# Altium PCB Aq1B_Guppy.PcbDoc
Units mm, origin at the board's own origin, x right, y up, seen from the top; angles counter-clockwise.
Board outline 105 x 55 mm, 2 copper layers (Top Layer, Bottom Layer); 40 components, 24 nets, 140 pads, 25 vias.
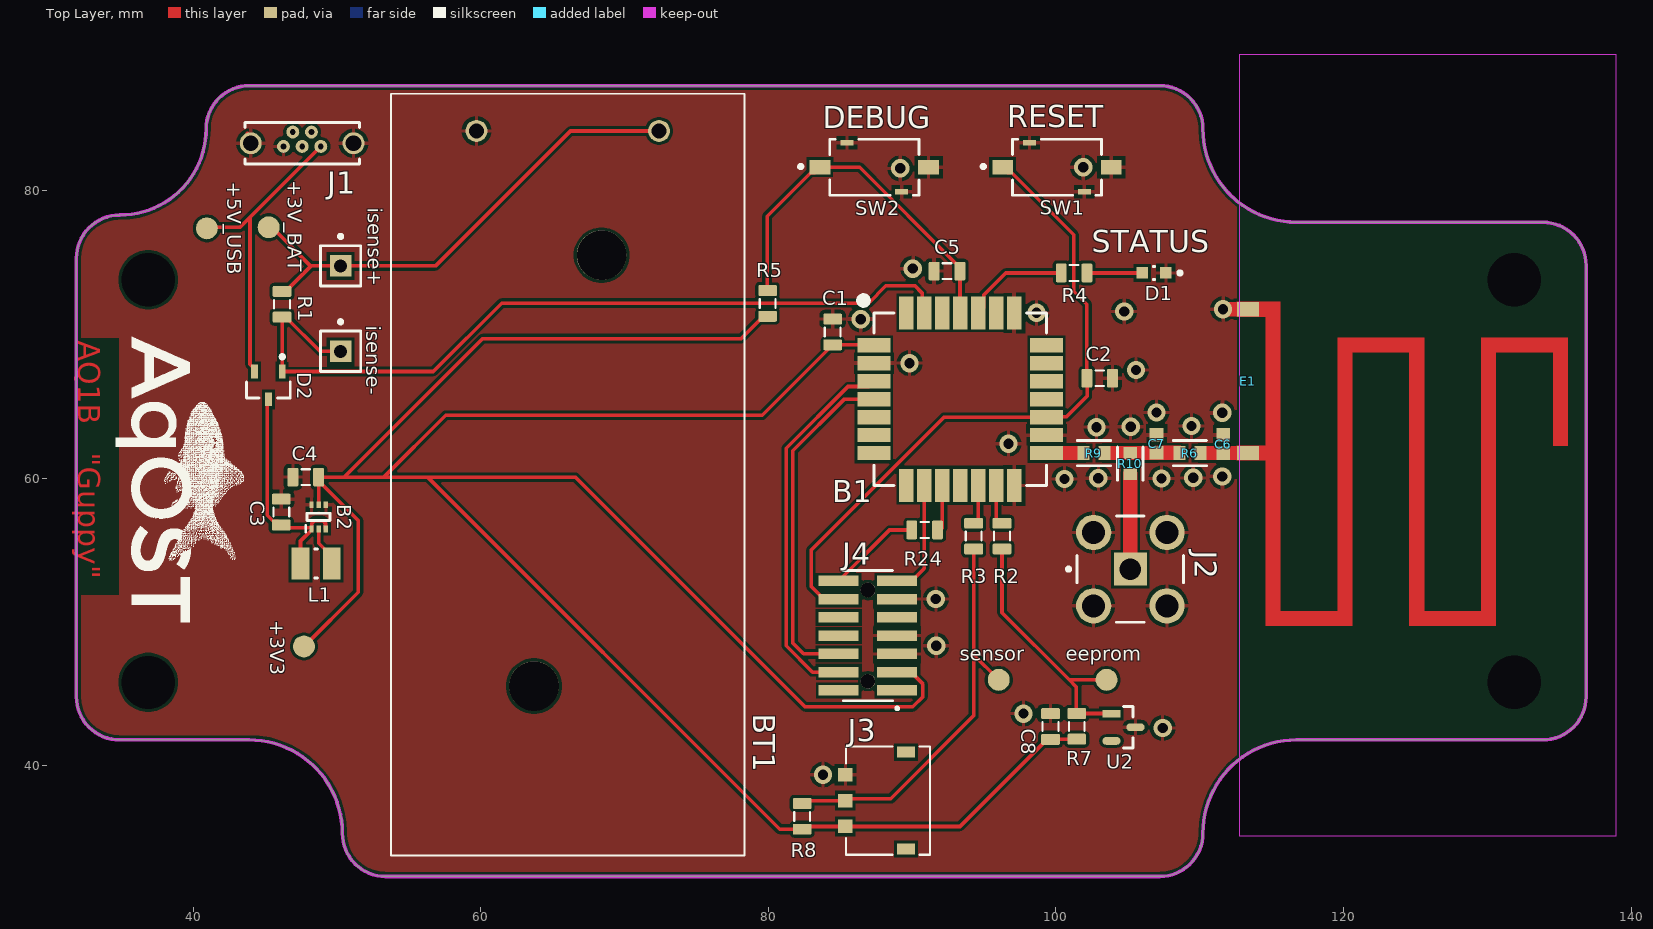
[diagram p0: Top Layer view]
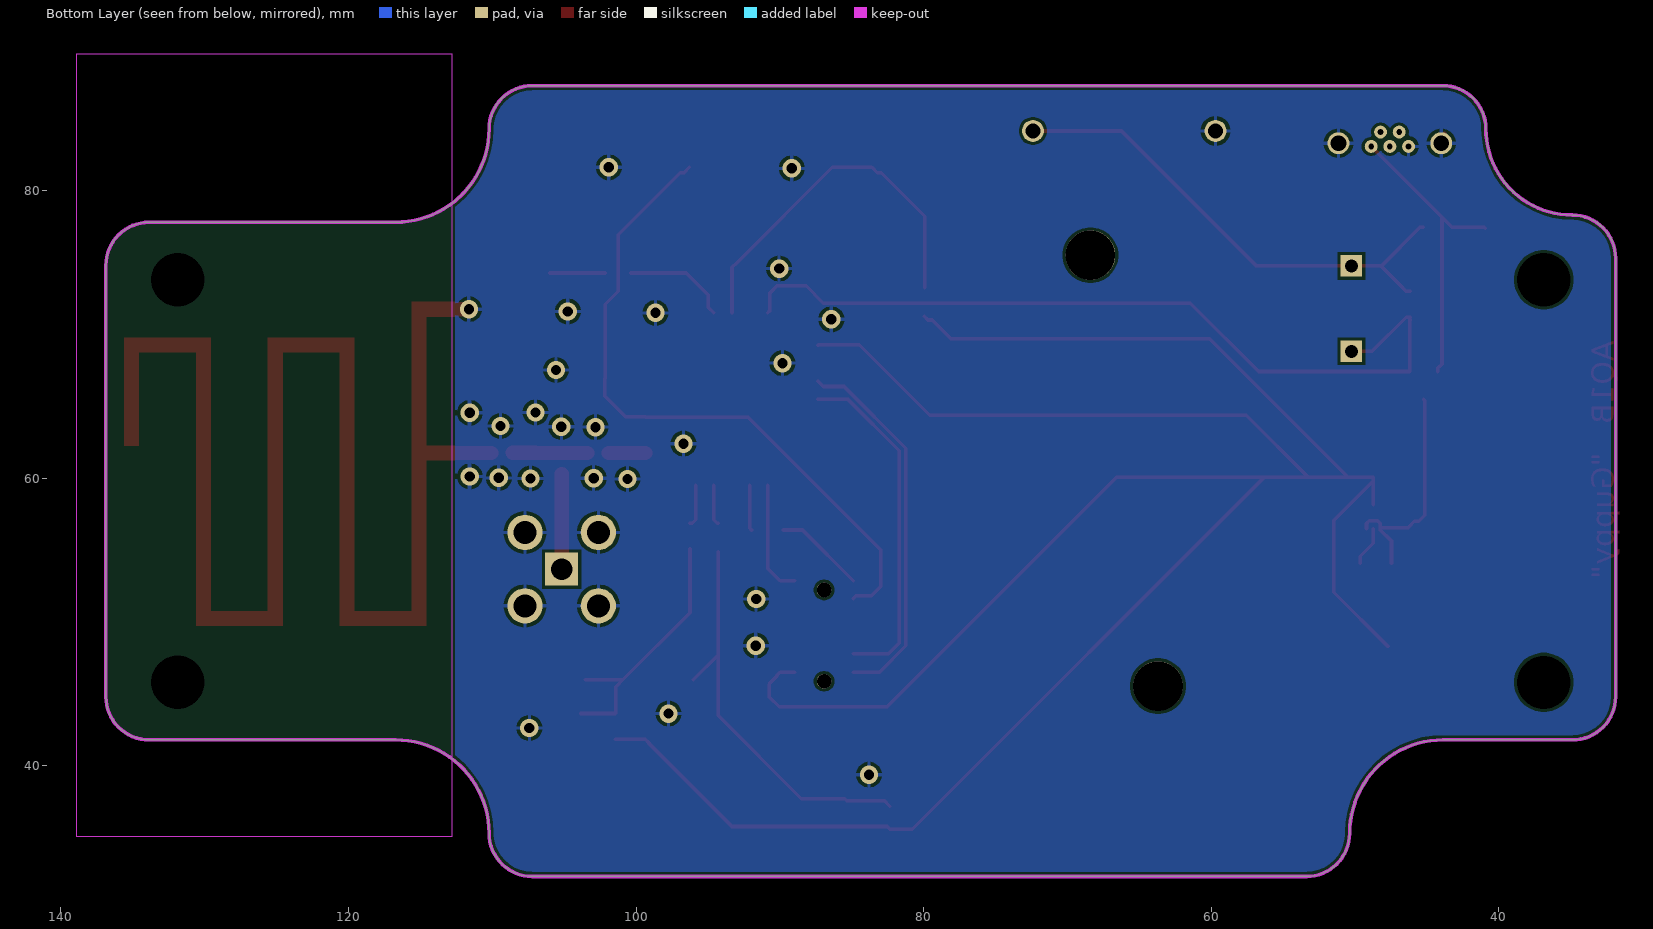
[diagram p1: Bottom Layer view, seen from below]
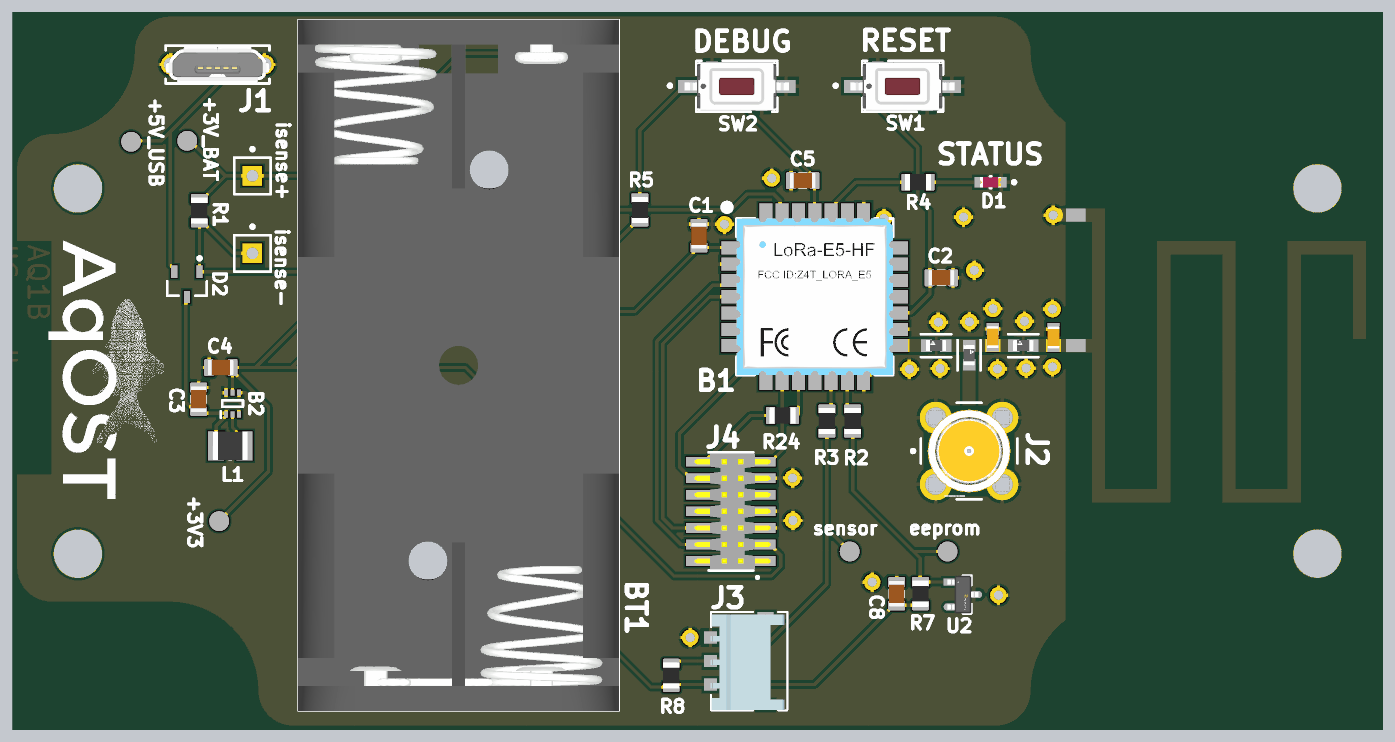
[diagram p2: 3D render of the assembled board from above, using the file's embedded part models]

## Layer stack, top to bottom
Top Solder: solder mask 0.0102, Solder Resist, Dk 3.5
Top Layer: signal copper 0.0356
Dielectric 1: dielectric 0.32, FR-4, Dk 4.8
Bottom Layer: signal copper 0.0356
Bottom Solder: solder mask 0.0102, Solder Resist, Dk 3.5

## Board outline
34.875,41.798 43.875,41.798 cw(c43.875,35.298) 50.375,35.298 ccw(c53.375,35.298) 53.375,32.298 107.225,32.298 ccw(c107.225,35.298) 110.225,35.298 cw(c116.725,35.298) 116.725,41.798 133.875,41.798 ccw(c133.875,44.798) 136.875,44.798 136.875,74.798 ccw(c133.875,74.798) 133.875,77.798 116.725,77.798 cw(c116.725,84.298) 110.225,84.298 ccw(c107.225,84.298) 107.225,87.298 43.9,87.298 43.9,87.3 ccw(c43.9,84.3) 40.9,84.3 cw(c34.9,84.3) 34.9,78.3 34.875,78.298 ccw(c34.875,75.298) 31.875,75.298 31.875,44.798 ccw(c34.875,44.798)

## Design rules (kind name [scope] priority, off if disabled: settings)
Clearance Clearance_1 [All] p1: gap=0.2 ignorepadtopadclearanceinfootprint=TRUE
PolygonConnect [All] p1: connectstyle=Relief reliefconductorwidth=0.254 reliefentries=4 polygonreliefangle="90 Angle" airgapwidth=0.254
RoutingVias [All] p1: holewidth=0.711 width=1.27 viastyle="Through Hole" minholewidth=0.711 minwidth=1.27 maxholewidth=0.711 maxwidth=1.27
SolderMaskExpansion [All] p1: expansion=0.102 istentingtop=FALSE
SupplyNets "Schematic Supply Nets" [InNet('GND')] p1: voltage=0.000
Width [All] p1: maxlimit=1 minlimit=0.254 preferedwidth=0.254 minimp=50.000000 maximp=50.000000 favimp=50.000000 checkconnectedcopper=TRUE
30 further rules are at their usual default settings.

## Components (designator, comment, footprint, x,y, rotation, side; value= is the part's Value field where it differs from the comment)
+3V3 "test_point" test_point 47.7,48.3 r0 top (schematic designator TP2)
+3V_BAT "test_point" test_point 45.25,77.45 r0 top
+5V_USB "test_point" test_point 40.95,77.375 r90 top (schematic designator TP3)
B1 "114993121" 114993121 93.35,65.5 r0 top
B2 "TPS61299DRLR" SOTFL50P160X60-6N 48.725,57.312 r90 top
BT1 "2468" BAT_2468 66.05,60.25 r90 top
C1 "Capacitor 4.7µF +/-40% 25V 0805" CAPC0805(2012)145_L 84.475,70.175 r90 top value="100n 10V"
C2 "Capacitor 4.7µF +/-40% 25V 0805" CAPC0805(2012)145_L 103.05,66.95 r0 top value="100n 10V"
C3 "Capacitor 4.7µF +/-40% 25V 0805" CAPC0805(2012)145_L 46.125,57.65 r90 top value="10u 10V"
C4 "Capacitor 4.7µF +/-40% 25V 0805" CAPC0805(2012)145_L 47.825,60.075 r180 top value="10u 10V"
C5 "Capacitor 4.7µF +/-40% 25V 0805" CAPC0805(2012)145_L 92.425,74.4 r180 top value="100n 10V"
C6 "Capacitor 100 nF +/-10% 50 V 0603" CAPC1608X90X40NL10T20 111.65,62.375 r270 top value=dnp
C7 "Capacitor 100 nF +/-10% 50 V 0603" CAPC1608X90X40NL10T20 107,62.4 r270 top value=dnp
C8 "Capacitor 4.7µF +/-40% 25V 0805" CAPC0805(2012)145_L 99.625,42.735 r90 top value="100n 10V"
D1 "SML-D12V8WT86C" FP-SML-D12-MFG 106.825,74.275 r180 top
D2 "PMEG2005CT,215" STM-BAT54CFILM-3_V 45.225,66.45 r270 top
E1 "Antenna" Antenna 112.59,61.75 r0 top
eeprom "test_point" test_point 103.525,45.975 r90 top (schematic designator TP5)
isense+ "isense+" PIN1 50.25,74.765 r0 top (schematic designator P1)
isense- "isense-" PIN1 50.25,68.825 r0 top (schematic designator P2)
J1 "USB3130-XX-X_REVD" GCT_USB3130-XX-X_REVD 47.575,83.295 r180 top
J2 "RF2-04A-T-00-50-G" FP-RF2-04A-T-00-50-G-MFG 105.175,53.675 r0 top
J3 "2082940030" CONN_2082940000-SD_03_MOL 88.325,37.575 r90 top
J4 "FTSH-107-01-L-DV-K-A" SAMTEC_FTSH-107-01-L-DV-K-A 86.925,49.05 r90 top
L1 "WPN252010H1R0MT" INDC2520X120X60NL20T20 48.55,54.075 r0 top value=1µH
R1 "" RESC0805(2012)_L 46.175,72.1 r90 top value=0R
R2 "" RESC0805(2012)_L 96.25,55.975 r90 top value="49R9 1/16W"
R3 "" RESC0805(2012)_L 94.275,55.975 r90 top value="49R9 1/16W"
R4 "" RESC0805(2012)_L 101.26,74.275 r180 top value="1k 1/8W"
R5 "" RESC0805(2012)_L 79.95,72.15 r270 top value="1k 1/8W"
R6 "0R" FP-MCT0603-IPC_B 109.325,61.75 r180 top
R7 "" RESC0805(2012)_L 101.45,42.735 r270 top value="1k 1/8W"
R8 "" RESC0805(2012)_L 82.35,36.475 r270 top value="4k7 1/16W"
R9 "0R" FP-MCT0603-IPC_B 102.65,61.75 r180 top
R10 "dnp" FP-MCT0603-IPC_B 105.175,61.021 r90 top
R24 "" RESC0805(2012)_L 90.875,56.4 r0 top value="49R9 1/16W"
sensor "test_point" test_point 96.025,45.975 r90 top (schematic designator TP4)
SW1 "PTS636 SKG25 SMTR LFS" FP-PTS636_SKG25_SMTR_LFS-MFG 100.075,81.625 r0 top
SW2 "PTS636 SKG25 SMTR LFS" FP-PTS636_SKG25_SMTR_LFS-MFG 87.375,81.625 r0 top
U2 "AT21CS01-STUM10-T" FP-3TS1-IPC_C 104.7,42.675 r0 top

## Footprints (in the part's own frame and the unit in brackets; to place one, negate y for a bottom-side part, rotate by r counter-clockwise, add the part's x,y. Pads: shape width x height; smd on the part's side, far side on the other; paste and mask are expansions set on the pad)
114993121 [mm]
  rect 2.3x1 smd: 1(-6,3.75) 2(-6,2.5) 3(-6,1.25) 4(-6,0) 5(-6,-1.25) 6(-6,-2.5) 7(-6,-3.75) 15(6,-3.75) 16(6,-2.5) 17(6,-1.25) 18(6,0) 19(6,1.25) 20(6,2.5) 21(6,3.75)
  rect 1x2.3 smd: 8(-3.75,-6) 9(-2.5,-6) 10(-1.25,-6) 11(0,-6) 12(1.25,-6) 13(2.5,-6) 14(3.75,-6) 22(3.75,6) 23(2.5,6) 24(1.25,6) 25(0,6) 26(-1.25,6) 27(-2.5,6) 28(-3.75,6)
  silkscreen extent -7.11,-6 6,7.24, body extent -6,-6 6,6, height 2.52
Antenna [mm]
  rect 1.524x1 smd paste+0 mask+0: 1(0.76,0) 2(0.76,10)
  Top Layer region: 2,-12.007 2,-0.507 0,-0.507 0,0.507 2,0.507 2,9.493 0,9.493 0,10.5 0,10.507 0.007,10.507 3.007,10.507 3.013,10.507 3.013,10.5 3.013,-10.993 7,-10.993 7,8 7,8.007 7.007,8.007 13.007,8.007 13.013,8.007 13.013,8 13.013,-10.993 17,-10.993 17,8 17,8.007 17.007,8.007 23.007,8.007 23.013,8.007 23.013,8 23.013,0.5 23.013,0.493 23.007,0.493 22.007,0.493 22,0.493 22,0.5 22,6.993 18.013,6.993 18.013,-12 18.007,-12.007 12.007,-12.007 12,-12.007 12,-12 12,6.993 8.013,6.993 8.013,-12 8.007,-12.007
BAT_2468 [mm]
  round 1.53 hole 1.02: N(23.9,6.35) P(23.9,-6.35)
  round 3.45 hole 3.45 unplated: ""(-14.71,2.35) ""(15.26,-2.35)
  silkscreen extent -26.49,-12.29 26.49,12.29, body extent -26.5,-12.29 26.48,12.29, height 13.01
CAPC0805(2012)145_L [mm] "Chip Capacitor, Body 2.0x1.2mm, Height 1.45mm, IPC High Density"
  rrect25% 0.76x1.3 smd: 1(-0.9,0) 2(0.89,0)
  silkscreen extent -0.3,-0.55 0.3,0.55, body extent -1,-0.6 1,0.6, height 1.45
CAPC1608X90X40NL10T20 [mm] "Chip Capacitor, 2-Leads, Body 1.70x0.90mm, IPC Medium Density"
  rect 0.95x0.95 smd: 1(-0.625,0) 2(0.625,0)
  body extent -0.85,-0.45 0.85,0.45, height 0.9
CONN_2082940000-SD_03_MOL [mil]
  rect 37x39 smd paste+0 mask+0: 1(-70.87,116.89) 2(0,116.89) 3(70.87,116.89)
  rect 30x49 smd paste+0 mask+0: 4(-132.48,-49.45) 5(132.48,-49.45)
  silkscreen extent -148,-115 148,115, body extent -147,-107 140,117, height 61
FP-3TS1-IPC_C [mm]
  rect 1.274x0.532 smd paste+0 mask+0: 1(-0.835,0.95)
  rrect100% 1.274x0.532 smd paste+0 mask+0: 2(-0.835,-0.95) 3(0.835,0)
  silkscreen extent 0,-1.45 0.65,1.45, body extent -1.57,-1.55 1.57,1.55, height 0.25
FP-MCT0603-IPC_B [mm]
  rect 0.864x0.962 smd paste+0 mask+0: 1(-0.729,0) 2(0.729,0)
  silkscreen extent -1.16,-0.88 1.16,0.88, body extent -1.41,-0.73 1.41,0.73, height 0.25
FP-PTS636_SKG25_SMTR_LFS-MFG [mm]
  rect 1.45x1 smd paste+0 mask+0: 1(-3.775,0) 2(3.775,0)
  rect 0.9x0.4 smd paste+0 mask+0: 3(-1.9,1.7) 4(1.9,-1.7)
  silkscreen extent -5.25,-1.95 3.1,1.95, body extent -4.6,-2.05 4.6,2.05, height 0.25
FP-RF2-04A-T-00-50-G-MFG [mm]
  rect 2.3x2.3 hole 1.5 paste-2539.97 mask+0: 1(0,0)
  round 2.45 hole 1.6 paste-2539.97 mask+0: 2(-2.55,2.55) 3(2.55,2.55) 4(-2.55,-2.55) 5(2.55,-2.55)
  silkscreen extent -4.42,-3.7 3.7,3.7, body extent -3.88,-3.88 3.88,3.88, height 0.25
FP-SML-D12-MFG [mm]
  rect 0.8x0.8 smd paste+0 mask+0: 1(-0.825,0) 2(0.825,0)
  silkscreen extent -1.92,-0.45 0.05,0.45, body extent -1.33,-0.55 1.33,0.55, height 0.25
GCT_USB3130-XX-X_REVD [mm]
  round 0.9 hole 0.4: 1(-1.3,0.22) 2(-0.65,-0.78) 3(0,0.22) 4(0.65,-0.78) 5(1.3,0.22)
  round 1.524 hole 1.1: 6(-3.575,0) 7(3.575,0)
  silkscreen extent -3.98,-1.45 3.98,1.45, body extent -3.97,-1.43 3.97,1.5, height 6.11
INDC2520X120X60NL20T20 [mm] "Chip Inductor, 2-Leads, Body 2.70x2.20mm, IPC Medium Density"
  rect 1.23x2.22 smd: 1(-1.085,0) 2(1.085,0)
  silkscreen extent -0.1,-1.01 0.1,1.01, body extent -1.35,-1.1 1.35,1.1, height 1.2
PIN1 [mm] "Connector; Plug"
  rect 1.5x1.5 hole 0.9: 1(0,0)
  silkscreen extent -1.4,-1.4 1.4,2.17
RESC0805(2012)_L [mm] "Chip Resistor, Body 2.0x1.3mm, IPC High Density"
  rrect25% 0.76x1.3 smd: 1(-0.9,0) 2(0.89,0)
  silkscreen extent -0.3,-0.55 0.3,0.55, body extent -1,-0.62 1,0.63, height 0.6
SAMTEC_FTSH-107-01-L-DV-K-A [mm]
  rect 0.74x2.79 smd: 01(-3.81,-2.035) 02(-3.81,2.035) 03(-2.54,-2.035) 04(-2.54,2.035) 05(-1.27,-2.035) 06(-1.27,2.035) 07(0,-2.035) 08(0,2.035) 09(1.27,-2.035) 10(1.27,2.035) 11(2.54,-2.035) 12(2.54,2.035) 13(3.81,-2.035) 14(3.81,2.035)
  round 1.02 hole 1.02 unplated mask+0.051: ""(-3.175,0) ""(3.175,0)
  silkscreen extent -5.16,-2.13 4.53,1.72, body extent -4.44,-3.05 4.45,2.79, height 5.96
SOTFL50P160X60-6N [mm]
  rect 0.475x0.3 smd: 1(-0.838,0.5) 2(-0.838,0) 3(-0.838,-0.5) 4(0.838,-0.5) 5(0.838,0) 6(0.838,0.5)
  silkscreen extent -1.07,-0.8 0.25,0.9
STM-BAT54CFILM-3_V [mm] "SOT23, 3-Leads, Body 3.04x1.75mm, Pitch 0.97mm"
  rect 0.95x0.48 smd: 1(-0.97,0.97) 2(-0.97,-0.97) 3(0.97,0)
  silkscreen extent -2.12,-1.52 0.87,1.52, body extent -0.87,-1.52 0.87,1.52, height 1.4
test_point [mil]
  round 60 smd: 0(0,0)

## Part data
B1: "General ISM < 1GHz LoRaWAN Transceiver Module 868MHz, 915MHz Antenna Not Included Surface Mount", Manufacturer_Name="Seeed Studio", Mouser Part Number=713-114993121, Datasheet Link=https://files.seeedstudio.com/products/114993120/Wio-E5-LE%20module%20datasheet_v1.0.pdf, Geometry.Height=2.7mm, Manufacturer_Part_Number=114993121, Mouser Price/Stock=https://www.mouser.co.uk/ProductDetail/Seeed-Studio/114993121?qs=QpmGXVUTftF1SD6oRXq2Mw%3D%3D
B2: "Switching Voltage Regulators 95nA quiescent current, 5.5V boost converter with input current limit and fast transient performance", Manufacturer_Name="Texas Instruments", Mouser Part Number=595-TPS61299DRLR, Datasheet Link=https://www.ti.com/lit/ds/symlink/tps61299.pdf?ts=1731385304163, Geometry.Height=0.6mm, Manufacturer_Part_Number=TPS61299DRLR, Mouser Price/Stock=https://www.mouser.co.uk/ProductDetail/Texas-Instruments/TPS61299DRLR?qs=IKkN%2F947nfBTwsVxPXoKBw%3D%3D
BT1: "Battery Holder, THM, 2 Cell, Cell Size AAA, Plastic", Package=None, Check_prices=https://www.snapeda.com/parts/2468/Keystone/view-part/?ref=eda, MF="Keystone Electronics", MP=2468, SnapEDA_Link=https://www.snapeda.com/parts/2468/Keystone/view-part/?ref=snap
C1 C2 C3 C4 C5 C8: library part CMP-001-00080-4, "Chip Capacitor, 4.7µF +/-40%, 25V, 0805, Thickness 1.45 mm", Case/Package=0805, Max Operating Temperature=85°C, Min Operating Temperature=-55°C, Tolerance=20%, Voltage Rating=25V, Mounting Technology=SMT, Pins=2
C6 C7: library part CMP-001-00017-6, "Chip Capacitor, 100 nF, +/- 10%, 50 V, 0603 (1608 Metric)", Capacitor Type=Ceramic, Case/Package=0603, Max Operating Temperature=125°C, Min Operating Temperature=-55°C, Tolerance=10%, Voltage Rating=50V, Mounting Technology=SM, Pins=2, RoHS Compliant=True
D1: library part CMP-08952-000027-1, "LED RED 1608 SMD", Case Code (Imperial)=0603, Case Code (Metric)=1608, Color=Red, Forward Voltage=2.2V, Lens Color=White, Test Current=20mA, Case/Package=0603, Dominant Wavelength=630nm, Height=0.65mm, Length=1.6mm, Lens Size=0.8mm, Lens Style=Flat, Luminous Intensity=40mcd, Mount="Surface Mount", Packaging="Tape and Reel", Width=0.8mm
D2: library part CMP-2000-05362-1, "Small Signal Schottky Diode, 40 V, -40 to 150 degC, 3-Pin SOT23, RoHS, Tape and Reel", Diode Case Style=SOT-23, Forward Current If(AV)=300mA, Forward Surge Current Ifsm Max=1A, Forward Voltage VF Max=900mV, Manufacturer=STMicroelectronics, Operating Temperature Max=150degC, Package Description="3-Pin Small OutLine Transistor, Body 2.895 x 1.475 mm, Height 1.4 mm", Package Reference=BAT54CFILM-3, Repetitive Reverse Voltage Vrrm Max=30V, Automotive Qualification Standard=-, Datasheet URL=http://www2.st.com/content/ccc/resource/technical/document/datasheet/07/50/54/f2/0d/ba/4a/79/CD00001322.pdf/files/CD00001322.pdf/jcr:content/translations/en.CD00001322.pdf, Datasheet Version="Rev. 11, 02/2015", Diode Configuration=DualCommonCathode, Manufacturer URL=http://www.st.com/, No. of Pins=3Pins, Package URL=http://www2.st.com/content/ccc/resource/technical/document/datasheet/07/50/54/f2/0d/ba/4a/79/CD00001322.pdf/files/CD00001322.pdf/jcr:content/translations/en.CD00001322.pdf, Packaging=CutTape, Product Range=BAT54Series, SVHC=NoSVHC(17-Dec-2015)
E1: "Generic Antenna", LatestRevisionDate=17-Jul-2002, LatestRevisionNote="Re-released for DXP Platform.", PackageReference=PIN1, Published=24-Mar-1999, Publisher="Altium Limited"
isense+ isense-: library part Plug, "Plug", LatestRevisionDate=17-Jul-2002, LatestRevisionNote="Re-released for DXP Platform.", Publisher="Altium Limited"
J1: "USB - micro B USB 2.0 Receptacle Connector 5 Position Through Hole", Package=None, Availability="In Stock", Check_prices=https://www.snapeda.com/parts/USB3130-30-A/Global+Connector+Technology/view-part/?ref=eda, MF="Global Connector Technology", MP=USB3130-30-A, Price=None, SnapEDA_Link=https://www.snapeda.com/parts/USB3130-30-A/Global+Connector+Technology/view-part/?ref=snap
J2: library part CMP-42753-000002-1, "CONN SMA JACK STR 50 OHM PCB"
J3: "Pico-EZmate HC PCB Header, 1.80mm Pitch, Single Row, Gold (Au) Plating, 3 Circuits", Manufacturer_Name="Molex Connector Corporation", Copyright="Copyright (C) 2025 Ultra Librarian. All rights reserved.", Manufacturer_Part_Number=2082940030, RefDes=RefDes, Type=Type
J4: "Connector Header Surface Mount 14 position 0.050 (1.27mm)", Package=None, Check_prices=https://www.snapeda.com/parts/FTSH-107-01-L-DV-K-A/Samtec+Inc./view-part/?ref=eda, MF="Samtec Inc.", MP=FTSH-107-01-L-DV-K-A, SnapEDA_Link=https://www.snapeda.com/parts/FTSH-107-01-L-DV-K-A/Samtec+Inc./view-part/?ref=snap
L1: library part CMP-006-00008-6, "Chip Inductor, 1 uH, +/- 20%, 1 MHz, -55 to 125 degC, 1008 (2520 Metric), RoHS, Tape and Reel", Case/Package=1008, Current Rating=1.5A, Manufacturer=Murata, Max Operating Temperature=85°C, Min Operating Temperature=-40°C, Package Description="2-Pin Surface Mount Device, Body 2.5 x 2 mm", Package Quantity=3000, Resistance=0.09Ohm, Self Resonant Frequency=70MHz, Tolerance=20%, Core Material=Ferrite, Datasheet URL=http://psearch.en.murata.com/inductor/product/LQM2HPN1R0MJ0%23.pdf, Datasheet Version=Aug-16, Mounting Technology=SM, Package Reference=1008, Packaging=TapeandReel, RoHS Compliant=True, Shielding=Shielded
R1 R2 R3 R4 R5 R7 R8 R24: library part CMP-009-00122-3, "Chip Resistor, 470 Ohms, +/-5%, 125 mW, -55 to 155 degC, 0805", Case/Package=0805, Max Operating Temperature=155°C, Min Operating Temperature=-55°C, Power=125mW, Tolerance=5%, Pins=2
R6 R9 R10: library part CMP-02407-000658-1, "RES SMD 100 OHM 1% 1/8W 0603", Case Code (Imperial)=0603, Case Code (Metric)=1608, Max Operating Temperature=175°C, Min Operating Temperature=-55°C, Package Quantity=5000, Power Rating=125mW, Resistance=4.99kR, Temperature Coefficient=25ppm/°C, Tolerance=0.5%, Voltage Rating=75V, Case/Package=0603, Composition="Thin Film", Contact Plating=Tin, Height=0.45mm, Length=1.55mm, Mount="Surface Mount", Packaging="Tape and Reel", Termination=SMD/SMT, Weight=7.1E-05oz, Width=0.85mm
SW1 SW2: library part CMP-10040-000025-1, "TACT 6.0 X 3.5, 2.5 MM H, 250GF,"
U2: library part CMP-06313-000022-1, "IC EEPROM 1K I2C 125KHZ SOT23", Frequency=125kHz, Manufacturer=Microchip, Max Supply Voltage=3.6V, Min Supply Voltage=1.7V, Nominal Supply Current=0.08-0.2mA, Package=3TS1, Temperature="-40°C to +85°C", Temperature Range High=+85°C, Temperature Range Low=-40°C, Automotive=No, Category=IC, ComponentLink2Description=Datasheet, ComponentLink2URL=http://ww1.microchip.com/downloads/en/DeviceDoc/20005857C.pdf, Device Class L1="Integrated Circuits (ICs)", Device Class L2=Memory, Device Class L3=EEPROM, Digikey Description="IC EEPROM 1K I2C 125KHZ SOT23", Height=1.12mm, Interface=I2C,Other, Ipc Land Pattern Name=SOT95P237X100-3, Lead Free=Yes, Manufacturer Part Number=AT21CS01-STUM10-T, Memory Size=1Kbits, Octopart=https://octopart.com/at21cs01-stum10-t-microchip-77757908, RoHS=TRUE, Standoff Height=0.01mm

## Free pads (board coordinates)
  round 1.524 hole 3.7: 11(36.875,45.798) 12(36.875,73.798) 13(131.875,73.804) 14(131.875,45.804)

## Via types
v1: diameter 1.27, hole 0.711, Top Layer to Bottom Layer, 25 vias

## Nets (pads, with @x,y where several pads share a name; then routed paths per layer and width w, separated by ;. In a path a pad name is that pad's centre, name@x,y a point inside that pad or via, vN(x,y) a via of type N, cw(c..) or ccw(c..) an arc to the next point about the centre after c; other vN are vias at no path point)
+3V3: +3V3.0 B1.1 B2.5 C1.1 C4.1 C8.1 J3.1 J4.03 R5.2 R7.2 R8.2 | length 198
  Top Layer w0.254: +3V3.0 51.475,52.075 51.475,57.055 C4.1@48.725,59.805 ; B2.5 C4.1@48.725,59.805 ; R5.2 79.697,71.007 79.407,71.007 78.1,69.7 60.122,69.7 50.497,60.075 ; J3.1@85.331,35.775 82.54,35.775 R8.2 80.79,35.585 56.3,60.075 ; J3.1 93.325,35.775 99.102,41.552 99.102,41.582 99.355,41.835 C8.1 ; B1.1 87.325,69.275 C1.1 79.575,64.375 57.566,64.375 53.266,60.075 ; J4.03 89.985,46.51 90.228,46.267 90.228,46.199 90.75,45.677 90.75,44.803 90.047,44.1 82.55,44.1 66.575,60.075 56.3,60.075 ; C8.1@99.625,41.845 R7.2 ; C4.1@48.725,59.805 C4.1 50.497,60.075 ; 50.497,60.075 53.266,60.075 ; 53.266,60.075 56.3,60.075
+3V_BAT: B1.27 D2.1 isense-.1 R1.1 | length 57.3
  Top Layer w0.254: R1.1@46.175,71 46.195,70.98 D2.1 56.695,67.42 61.45,72.175 86.975,72.175 88.175,73.375 90.2,73.375 90.693,72.882 90.693,71.657 B1.27 ; R1.1 46.445,71.2 48.82,68.825 isense-.1
+5V_USB: +5V_USB.0 D2.2 J1.1 | length 21.2
  Top Layer w0.254: +5V_USB.0 41.029,77.454 43.254,77.454 43.95,78.15 ; D2.2 44.255,67.655 44.142,67.768 44.099,67.768 43.95,67.917 43.95,78.15 ; J1.1 43.95,78.15
dbg_uart_RX: B1.9 J4.13 | length 8
  Top Layer w0.254: J4.13 89.985,52.86 90.85,53.725 B1.9
dbg_uart_TX: J4.14 R24.1 | length 6.4
  Top Layer w0.254: J4.14 88.43,56.4 R24.1@89.775,56.4
DEBUG_PIN: B1.25 C5.1 R5.1 SW2.1 | length 25.8
  Top Layer w0.254: R5.1@79.925,73.25 79.925,78.225 82.952,81.252 83.227,81.252 SW2.1 86.35,81.625 93.052,74.923 93.072,74.923 93.325,74.67 C5.1 93.325,71.525 B1.25
eeprom_data: eeprom.0 R2.1 R7.1 U2.1 | length 18.6
  Top Layer w0.254: R2.1 96.25,50.65 100.925,45.975 ; eeprom.0 100.925,45.975 ; U2.1@103.854,43.635 R7.1 101.422,43.663 101.422,45.478 100.925,45.975
GND: B1.2 B1.14 B1.16 B1.22 B2.4 B2.6 BT1.N C1.2 C2.2 C3.2 C4.2 C5.2 C6.1 C7.1 C8.2 D1.1 E1.2 J1.5 J1.6 J1.7 J2.2 J2.3 J2.4 J2.5 J3.3 J4.05 J4.07 J4.11 SW1.2 SW1.3 SW1.4 SW2.2 SW2.3 SW2.4 U2.3 | length 1.4
  Top Layer w0.254: J1.7@43.77,83.975 J1.7@43.775,83.97 ; v1@112.025,71.7 v1@112.075,71.75
  Top Layer w1: v1@112.075,71.75 E1.2
  other v1: 83.8,39.375 107.425,42.625 97.75,43.625 91.675,48.35 91.65,51.6 100.602,59.948 107.352,59.973 102.952,59.998 109.552,60.023 111.575,60.125 96.7,62.4 102.825,63.55 105.2,63.575 109.425,63.625 111.575,64.55 107,64.575 105.575,67.525 89.825,68 86.425,71.05 98.65,71.5 104.75,71.6 111.625,71.75 90.05,74.575 89.175,81.55 101.9,81.625
LED_OUT: B1.24 R4.2 | length 7.4
  Top Layer w0.254: B1.24 94.973,71.873 94.973,72.735 96.513,74.275 R4.2
Net+3V_BAT_0: +3V_BAT.0 BT1.P isense+.1 R1.2 | length 34.9
  Top Layer w0.254: +3V_BAT.0 45.475,77.45 48.16,74.765 isense+.1 56.85,74.765 66.235,84.15 BT1.P ; R1.2 46.445,72.99 46.698,73.243 46.698,73.263 48.16,74.725
NetB1_10: B1.10 R24.2 | length 3.2
  Top Layer w0.254: R24.2@91.975,56.4 92.1,56.525 B1.10
NetB1_12: B1.12 R3.2 | length 2.8
  Top Layer w0.254: R3.2@94.277,56.867 94.349,56.867 94.6,57.118 B1.12
NetB1_13: B1.13 R2.2 | length 2.9
  Top Layer w0.254: B1.13 95.85,57.118 96.101,56.867 R2.2@96.248,56.867
NetB2_1: B2.1 B2.3 C3.1 D2.3 L1.1 | length 16.2
  Top Layer w0.254: D2.3 45.148,65.403 45.148,57.427 45.572,57.003 45.872,57.003 46.313,56.562 48.202,56.562 48.225,56.539 B2.1 ; L1.1 47.465,55.627 48.225,56.387 B2.1 ; B2.3 49.202,56.497 49.202,56.847 49.01,57.039 48.44,57.039 48.248,56.847 48.248,56.497 B2.1
NetB2_2: B2.2 L1.2 | length 2.8
  Top Layer w0.254: B2.2 48.725,55.48 49.635,54.57 L1.2
NetC6_2: C6.2 E1.1 R6.1 | length 3.3
  Top Layer w0.254: C6.2@111.625,61.75 C6.2@111.65,61.775
  Top Layer w1: R6.1 C6.2@111.625,61.75 ; C6.2 E1.1
NetC7_2: C7.2 R6.2 R9.1 R10.2 | length 5.2
  Top Layer w0.254: C7.2@106.975,61.75 C7.2 ; R6.2@108.571,61.775 R6.2
  Top Layer w1: R9.1 R10.2 C7.2@106.975,61.75 ; C7.2 R6.2@108.571,61.775
NetD1_2: D1.2 R4.1 | length 3.8
  Top Layer w0.254: R4.1 D1.2
NetJ2_1: J2.1 R10.1 | length 6.6
  Top Layer w1: J2.1 R10.1
NRST: B1.17 C2.1 J4.12 SW1.1 | length 46.9
  Top Layer w0.254: J4.12@84.89,51.625 84.682,51.833 83.617,51.833 82.975,52.475 82.975,54.987 92.238,64.25 B1.17 99.369,64.269 100.732,64.269 102.175,65.712 C2.1@102.175,66.95 ; SW1.1 96.673,81.252 96.923,81.252 101.25,76.925 101.25,73 102.15,72.1 C2.1
RFIO: B1.15 R9.2 | length 2.6
  Top Layer w1: B1.15 R9.2
sensor_data: J3.2 R3.1 R8.1 sensor.0 | length 28.4
  Top Layer w0.254: R8.1@82.35,37.175 82.75,37.575 J3.2 85.49,37.709 88.509,37.709 94.275,43.475 94.275,47.725 ; R3.1@94.275,54.875 94.275,47.725 ; sensor.0 94.275,47.725
SWCLK: B1.4 J4.06 | length 24
  Top Layer w0.254: J4.06 82.451,47.78 81.7,48.531 81.7,61.9 85.3,65.5 B1.4
SWDIO: B1.3 J4.04 | length 26.2
  Top Layer w0.254: J4.04 83.079,46.51 81.246,48.343 81.246,62.088 85.535,66.377 86.977,66.377 B1.3
pads on no net: B1.5 B1.6 B1.7 B1.8 B1.11 B1.18 B1.19 B1.20 B1.21 B1.23 B1.26 B1.28 BT1. J1.2 J1.3 J1.4 J3.4 J3.5 J4. J4.01 J4.02 J4.08 J4.09 J4.10 U2.2

## Polygon pours and split planes (outlines as drawn)
GND on Bottom Layer "GND_PLANE_BOT" (solid, pour order 1): 34.875,41.798 43.875,41.798 cw(c43.875,35.298) 50.375,35.298 ccw(c53.375,35.298) 53.375,32.298 107.225,32.298 ccw(c107.225,35.298) 110.225,35.298 cw(c116.725,35.298) 116.725,41.798 133.875,41.798 ccw(c133.875,44.798) 136.875,44.798 136.875,74.798 ccw(c133.875,74.798) 133.875,77.798 116.725,77.798 cw(c116.725,84.298) 110.225,84.298 ccw(c107.225,84.298) 107.225,87.298 43.9,87.298 43.9,87.3 ccw(c43.9,84.3) 40.9,84.3 cw(c34.9,84.3) 34.9,78.3 34.875,78.298 ccw(c34.875,75.298) 31.875,75.298 31.875,44.798 ccw(c34.875,44.798)
GND on Top Layer "GND_PLANE_TOP" (solid, pour order 0): 34.875,41.798 43.875,41.798 cw(c43.875,35.298) 50.375,35.298 ccw(c53.375,35.298) 53.375,32.298 107.225,32.298 ccw(c107.225,35.298) 110.225,35.298 cw(c116.725,35.298) 116.725,41.798 133.875,41.798 ccw(c133.875,44.798) 136.875,44.798 136.875,74.798 ccw(c133.875,74.798) 133.875,77.798 116.725,77.798 cw(c116.725,84.298) 110.225,84.298 ccw(c107.225,84.298) 107.225,87.298 43.9,87.298 43.9,87.3 ccw(c43.9,84.3) 40.9,84.3 cw(c34.9,84.3) 34.9,78.3 34.875,78.298 ccw(c34.875,75.298) 31.875,75.298 31.875,44.798 ccw(c34.875,44.798)

## Keep-outs
Top Layer:
  region: 112.775,89.475 138.928,89.475 138.928,35.1 112.775,35.1
Bottom Layer:
  region: 112.775,89.475 138.928,89.475 138.928,35.1 112.775,35.1
Keep-Out Layer:
  lines w0.254: 34.875,78.298 ccw(c34.875,75.298) 31.875,75.298 31.875,44.798 ccw(c34.875,44.798) 34.875,41.798 43.875,41.798 cw(c43.875,35.298) 50.375,35.298 ccw(c53.375,35.298) 53.375,32.298 107.225,32.298 ccw(c107.225,35.298) 110.225,35.298 cw(c116.725,35.298) 116.725,41.798 133.875,41.798 ccw(c133.875,44.798) 136.875,44.798 136.875,74.798 ccw(c133.875,74.798) 133.875,77.798 116.725,77.798 cw(c116.725,84.298) 110.225,84.298 ccw(c107.225,84.298) 107.225,87.298 43.9,87.298 ; 34.9,78.3 ccw(c34.9,84.3) 40.9,84.3 cw(c43.9,84.3) 43.9,87.3

## Other copper
Top Layer:
  text "AQ1B   \"Guppy\"" at 32,69.575 h1.52 r270

## Silkscreen, mask and mechanical layers (free items; w line width, h text height)
Top Overlay:
  drawing of 2371 lines, arcs and shapes, not listed
  text "RESET" at 96.625,84.4 h1.52
  text "DEBUG" at 83.775,84.35 h1.52
  text "STATUS" at 102.5,75.7 h1.52
Mechanical 1:
  drawing of 1273 lines, arcs and shapes, not listed